# Altium PCB PCB.PcbDoc
Units mm, origin at the board's own origin, x right, y up, seen from the top; angles counter-clockwise.
Board outline 64 x 88.4 mm, 2 copper layers (Top Layer, Bottom Layer), stack 1.569 mm thick; 70 components, 61 nets, 263 pads, 93 vias.
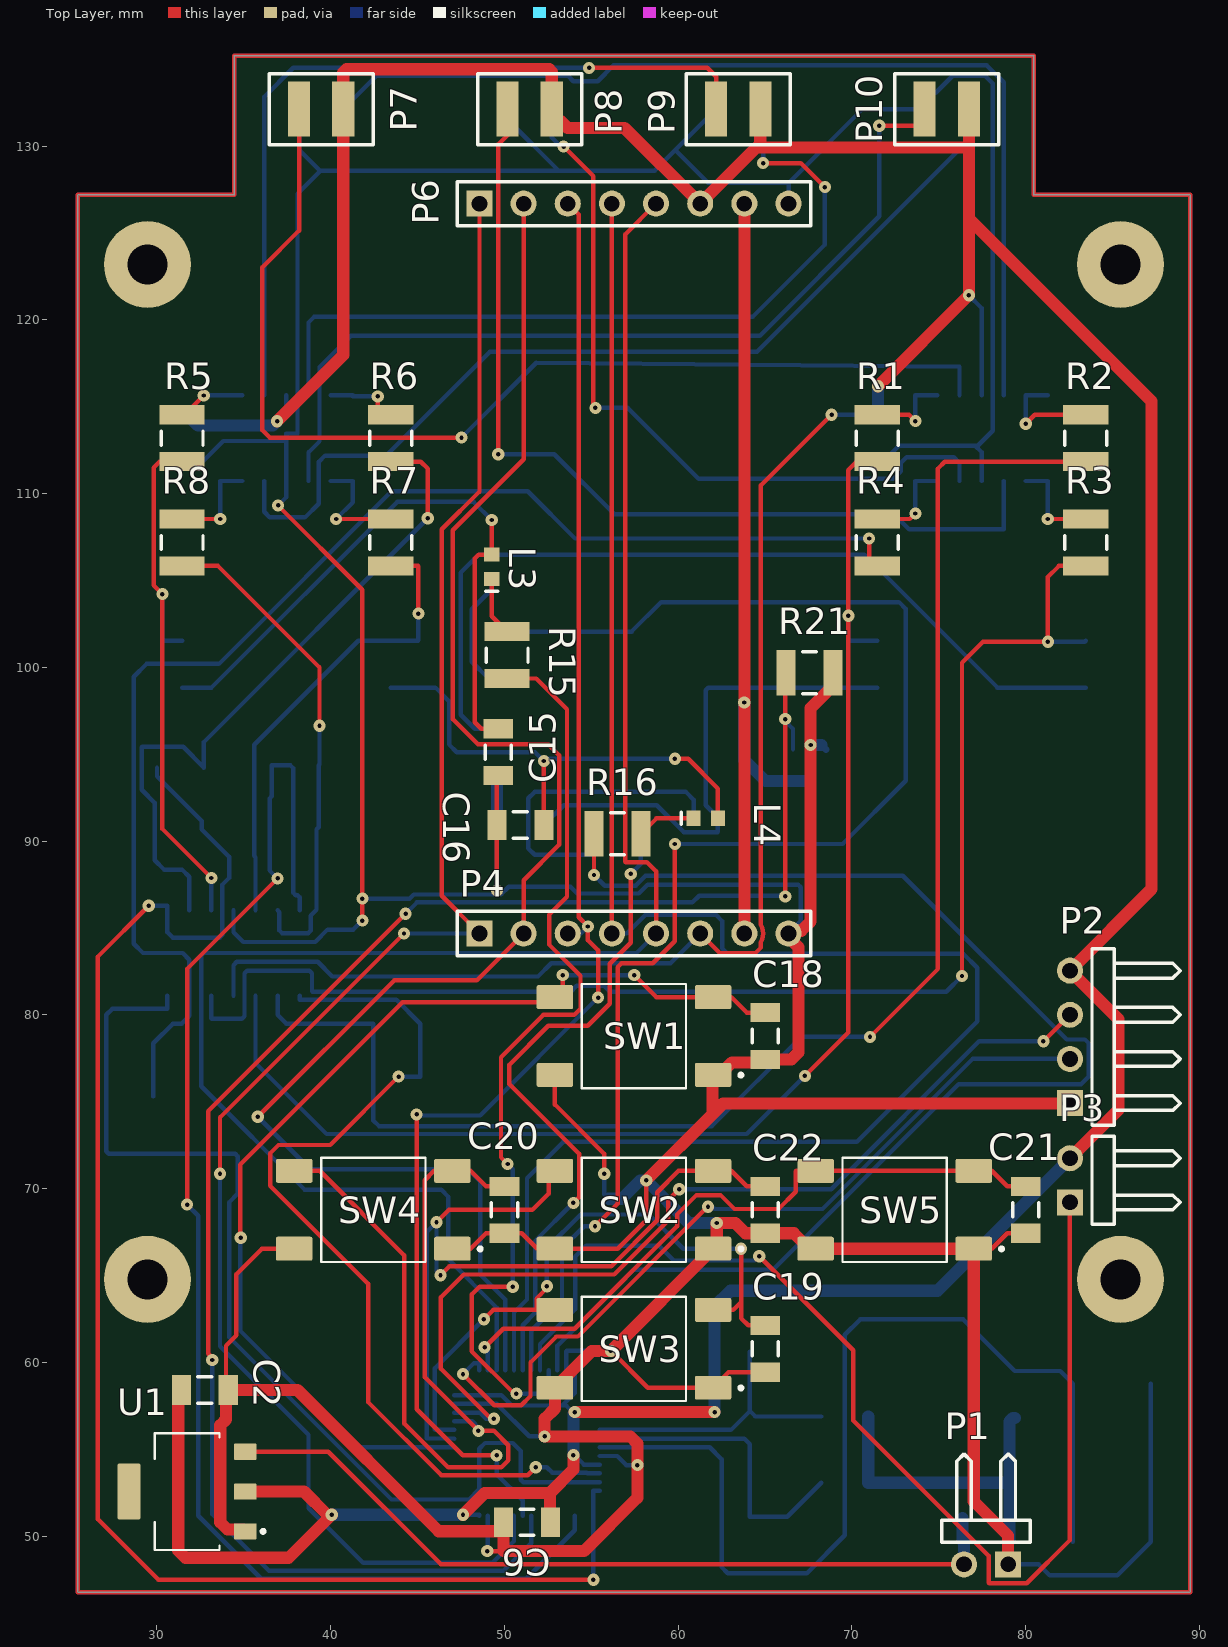
[diagram p0: Top Layer view]
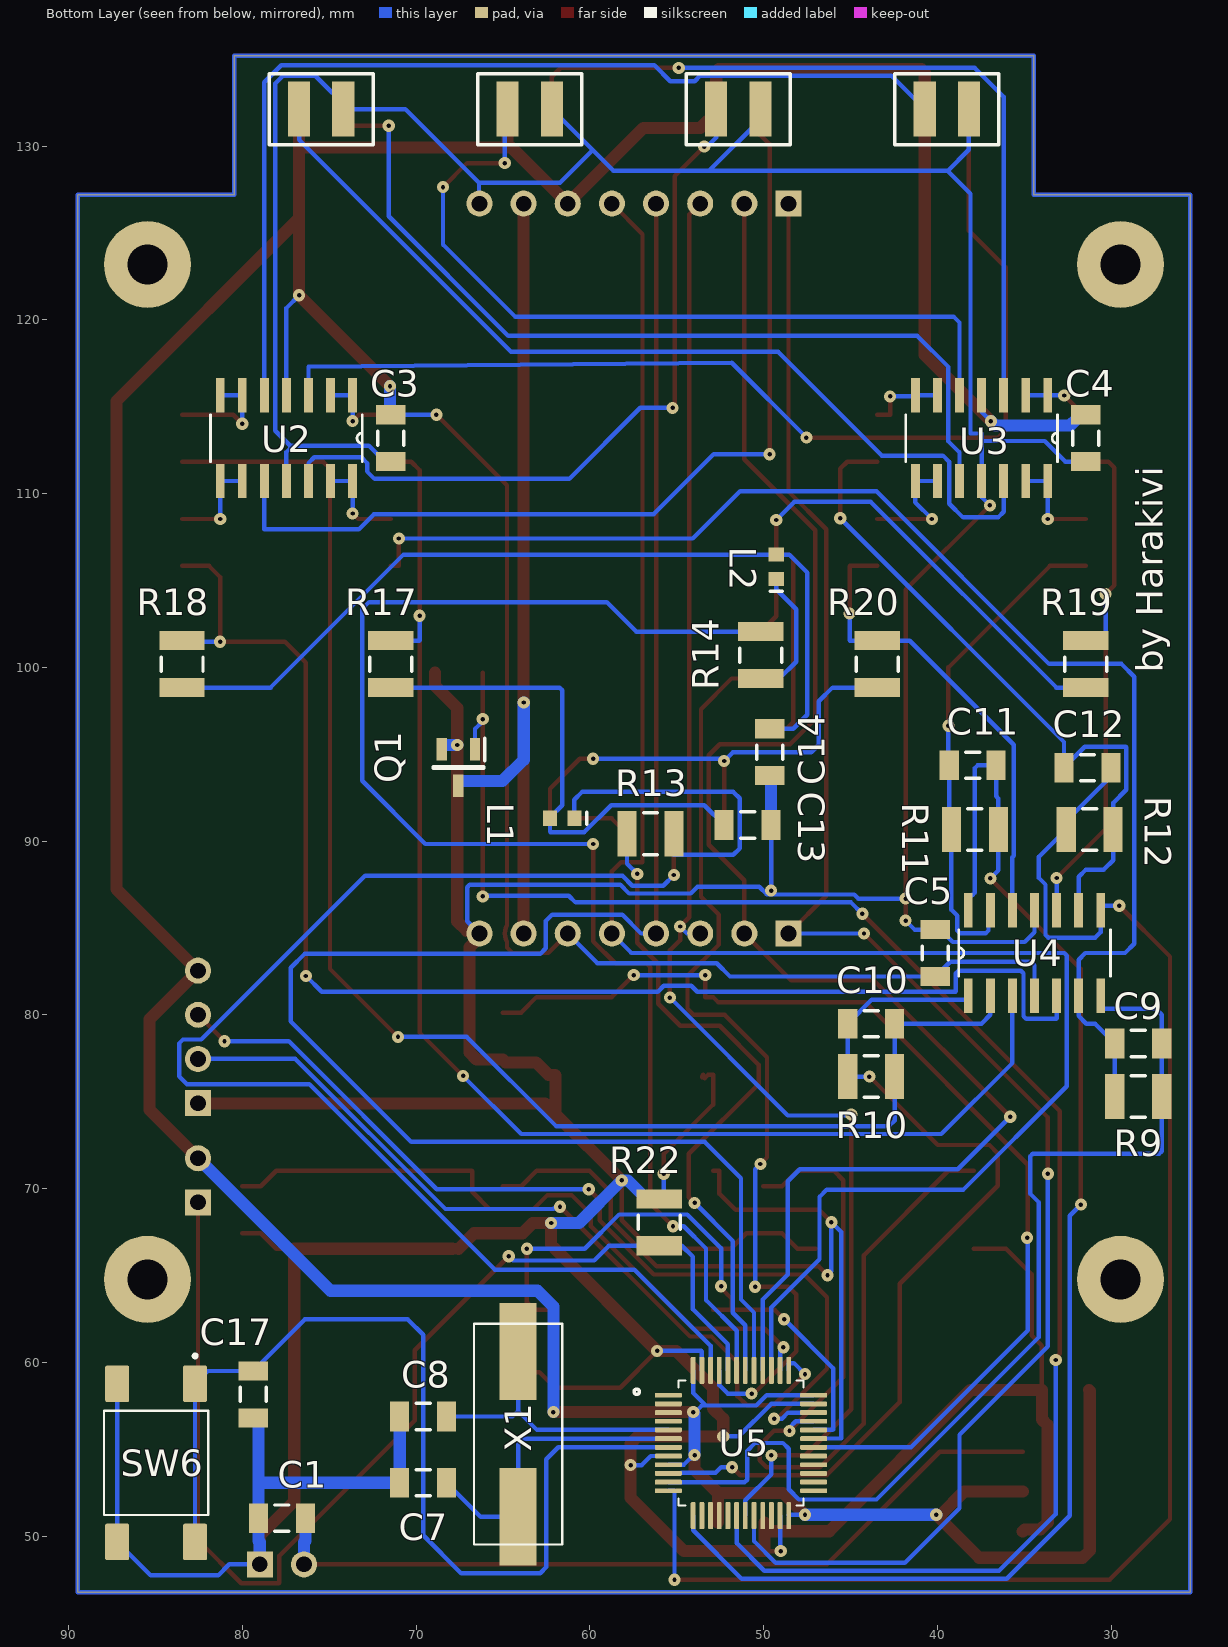
[diagram p1: Bottom Layer view, seen from below]

## Layer stack, top to bottom
Top Solder: solder mask 0.0254, SM-001, Dk 4
Top Layer: signal copper 0.035
Dielectric 1: core 1.4986, Core-043, Dk 4.3
Bottom Layer: signal copper 0.035
Bottom Solder: solder mask 0.0254, SM-001, Dk 4

## Board outline
25.464,46.79 25.464,127.19 34.464,127.19 34.464,135.19 80.464,135.19 80.464,127.19 89.464,127.19 89.464,46.79

## Design rules (kind name [scope] priority, off if disabled: settings)
Clearance [All] p1: gap=0.2 ignorepadtopadclearanceinfootprint=TRUE
DiffPairsRouting [All] p1: maxlimit=1 minlimit=0.1 mostfreqgap=0.254 toplayer_minwidth=0.1 toplayer_maxwidth=1 toplayer_prefwidth=0.381 bottomlayer_minwidth=0.1 bottomlayer_maxwidth=1 bottomlayer_prefwidth=0.381 maxuncoupledlength=12.7
PolygonConnect [All] p1: connectstyle=Relief reliefconductorwidth=0.254 reliefentries=4 polygonreliefangle="90 Angle" airgapwidth=0.254
RoomDefinition control [InComponentClass('control')] p1: confinementstyle=ConfineIn formatcopy=TRUE lockcomponents=FALSE outline 25.4,46.736 89.535,46.736 89.535,135.19 25.4,135.19
RoutingVias [All] p1: holewidth=0.254 width=0.7 viastyle="Through Hole" minholewidth=0.1 minwidth=0.1 maxholewidth=0.711 maxwidth=1.27
SilkToSilkClearance [All] p1: silktosilkclearance=0.1
SolderMaskExpansion [All] p1: expansion=0.102 istentingtop=FALSE
Width Width_V3.3 [InNet('V3.3')] p1: maxlimit=1 minlimit=0.1 preferedwidth=0.7 bottomlayer_prefwidth=0.254 minimp=50.000000 maximp=50.000000 favimp=50.000000
Width Width_GND [InNet('GND')] p2: maxlimit=1 minlimit=0.1 preferedwidth=0.7 bottomlayer_prefwidth=0.254 minimp=50.000000 maximp=50.000000 favimp=50.000000
Width [All] p3: maxlimit=1 minlimit=0.1 preferedwidth=0.254
28 further rules are at their usual default settings.

## Components (designator, comment, footprint, x,y, rotation, side; value= is the part's Value field where it differs from the comment)
C1 "Cap Semi" C1206 77.724,51.054 r180 bottom value=10uF
C2 "Cap Semi" C1206 32.766,58.42 r180 top value=1uF
C3 "Cap Semi" C1206 71.464,113.19 r90 bottom locked value=10uF
C4 "Cap Semi" C1206 31.464,113.19 r90 bottom locked value=10uF
C5 "Cap Semi" C1206 40.132,83.566 r270 bottom value=10uF
C6 "Cap Semi" C1206 51.308,50.8 r0 top value=10uF
C7 "Cap Semi" C1206 69.596,53.086 r180 bottom value=12pF
C8 "Cap Semi" C1206 69.596,56.896 r180 bottom value=12pF
C9 "Cap Semi" C1206 28.448,78.359 r0 bottom value=100pF
C10 "Cap Semi" C1206 43.815,79.502 r180 bottom value=100pF
C11 "Cap Semi" C1206 37.973,94.361 r0 bottom value=100pF
C12 "Cap Semi" C1206 31.369,94.234 r0 bottom value=100pF
C13 "Cap Semi" C1206 50.927,90.932 r0 bottom value=10uF
C14 "Cap Semi" C1206 49.657,95.123 r90 bottom value=10uF
C15 "Cap Semi" C1206 49.657,95.123 r90 top value=10uF
C16 "Cap Semi" C1206 50.927,90.932 r0 top value=10uF
C17 "Cap Semi" C1206 79.375,58.166 r90 bottom value=100nF
C18 "Cap Semi" C1206 65.014,78.79 r90 top locked value=100nF
C19 "Cap Semi" C1206 65.014,60.79 r90 top locked value=100nF
C20 "Cap Semi" C1206 50.014,68.79 r90 top locked value=100nF
C21 "Cap Semi" C1206 80.014,68.79 r90 top locked value=100nF
C22 "Cap Semi" C1206 65.014,68.79 r90 top locked value=100nF
L1 "Inductor" INDC1608L 61.595,91.313 r0 bottom value=10uH
L2 "Inductor" INDC1608L 49.276,105.791 r90 bottom value=10uH
L3 "Inductor" INDC1608L 49.276,105.791 r90 top value=10uH
L4 "Inductor" INDC1608L 61.595,91.313 r0 top value=10uH
P1 "BatteryCon" HDR1X2H 78.994,48.387 r180 top locked
P2 "Debug" HDR1X4H 82.55,74.93 r90 top
P3 "Header 2H" HDR1X2H 82.55,69.215 r90 top
P4 "DisplayPort" HDR1X8 48.574,84.69 r0 top locked
P6 "DisplayPort" HDR1X8 48.574,126.69 r0 top locked
P7 "Conn" CONNFOOT 40.733,132.128 r0 top locked
P8 "Conn" CONNFOOT 52.733,132.128 r0 top locked
P9 "Conn" CONNFOOT 64.733,132.128 r0 top locked
P10 "Conn" CONNFOOT 76.733,132.128 r0 top locked
Q1 "IRLML0030TRPBF" SOT95P237X112-3N 67.564,94.234 r270 bottom
R1 "Res3" 14-1210 71.464,113.19 r90 top locked value=1K
R2 "Res3" 14-1210 83.464,113.19 r90 top locked value=1K
R3 "Res3" 14-1210 83.464,107.19 r90 top locked value=1K
R4 "Res3" 14-1210 71.464,107.19 r90 top locked value=1K
R5 "Res3" 14-1210 31.464,113.19 r90 top locked value=1K
R6 "Res3" 14-1210 43.464,113.19 r90 top locked value=1K
R7 "Res3" 14-1210 43.464,107.19 r90 top locked value=1K
R8 "Res3" 14-1210 31.464,107.19 r90 top locked value=1K
R9 "Res3" 14-1210 28.448,75.311 r0 bottom value=1K
R10 "Res3" 14-1210 43.815,76.454 r180 bottom value=1K
R11 "Res3" 14-1210 37.846,90.678 r0 bottom value=1K
R12 "Res3" 14-1210 31.242,90.678 r180 bottom value=1K
R13 "Res3" 14-1210 56.515,90.424 r180 bottom value=10
R14 "Res3" 14-1210 50.165,100.711 r270 bottom value=10
R15 "Res3" 14-1210 50.165,100.711 r90 top value=10
R16 "Res3" 14-1210 56.515,90.424 r0 top value=10
R17 "Res3" 14-1210 71.464,100.19 r90 bottom locked value=1k
R18 "Res3" 14-1210 83.464,100.19 r90 bottom locked value=1k
R19 "Res3" 14-1210 31.464,100.19 r90 bottom locked value=1k
R20 "Res3" 14-1210 43.464,100.19 r270 bottom locked value=1k
R21 "Res3" 14-1210 67.564,99.695 r180 top value=10k
R22 "Res3" 14-1210 56.007,68.072 r270 bottom value=100k
SW1 "Up" TE_FSM4JSMA 57.464,78.79 r180 top locked
SW2 "Enter" TE_FSM4JSMA 57.464,68.79 r180 top locked
SW3 "Down" TE_FSM4JSMA 57.464,60.79 r180 top locked
SW4 "Left" TE_FSM4JSMA 42.464,68.79 r180 top locked
SW5 "Right" TE_FSM4JSMA 72.464,68.79 r180 top locked
SW6 "Reset" TE_FSM4JSMA 84.963,54.229 r270 bottom
U1 "AMS1117-3.3" SOT229P700X180-4N 31.75,52.578 r90 top
U2 "LM324AD" SOIC127P600X175-14N 77.464,113.19 r270 bottom locked
U3 "LM324AD" SOIC127P600X175-14N 37.464,113.19 r270 bottom locked
U4 "LM324AD" SOIC127P600X175-14N 34.417,83.566 r90 bottom
U5 "STM32F103C8T6" QFP50P900X900X160-48N 51.308,55.372 r180 bottom
X1 "ABLS-8.000MHZ-B4-T" HC-49/US 64.135,55.88 r270 bottom

## Footprints (in the part's own frame and the unit in brackets; to place one, negate y for a bottom-side part, rotate by r counter-clockwise, add the part's x,y. Pads: shape width x height; smd on the part's side, far side on the other; paste and mask are expansions set on the pad)
14-1210 [mm] "Chip Resistor, Body 3.2x2.5mm, IPC High Density"
  rect 1.1x2.6 smd: 1(-1.35,0) 2(1.35,0)
  silkscreen extent -0.4,-1.2 0.4,1.2, body extent -1.68,-1.32 1.68,1.32, height 0.9
C1206 [mm] "Chip Capacitor, Body 3.2x1.6mm, IPC High Density"
  rect 1.1x1.7 smd: 1(-1.35,0) 2(1.35,0)
  silkscreen extent -0.4,-0.75 0.4,0.75, body extent -1.7,-0.9 1.7,0.9, height 1.3
CONNFOOT [mm]
  rect 1.27x3.18 smd: 1(-2.54,0) 2(0,0)
  rect 1.27x3.18 smd far side: 3(-2.54,0) 4(0,0)
  silkscreen extent -4.26,-2.04 1.72,2.02
HC-49/US [mil]
  rect 220x83 smd: P$1(187,0) P$2(-187,0)
  silkscreen extent -250,-100 250,100
HDR1X2H [mm] "Connector; Header; 2 Position; Right Angle"
  rect 1.5x1.5 hole 0.9: 1(0,0)
  round 1.5 hole 0.9: 2(2.54,0)
  silkscreen extent -1.27,-6.35 3.81,-1.27
HDR1X4H [mm] "Connector; Header; 4 Position; Right Angle"
  rect 1.5x1.5 hole 0.9: 1(0,0)
  round 1.5 hole 0.9: 2(2.54,0) 3(5.08,0) 4(7.62,0)
  silkscreen extent -1.27,-6.35 8.89,-1.27
HDR1X8 [mm] "Connector; Header; 8 Position"
  rect 1.5x1.5 hole 0.9: 1(0,0)
  round 1.5 hole 0.9: 2(2.54,0) 3(5.08,0) 4(7.62,0) 5(10.16,0) 6(12.7,0) 7(15.24,0) 8(17.78,0)
  silkscreen extent -1.27,-1.27 19.05,1.27
INDC1608L [mm] "Chip Inductor, Body 1.6x0.8mm, IPC High Density"
  rect 0.8x0.9 smd: 1(-0.7,0) 2(0.7,0)
  silkscreen extent -1.4,-0.35 -1.4,0.35, body extent -0.87,-0.48 0.87,0.48, height 0.55
QFP50P900X900X160-48N [mm]
  rrect50% 1.56x0.28 smd: 1(-4.18,2.75) 2(-4.18,2.25) 3(-4.18,1.75) 4(-4.18,1.25) 5(-4.18,0.75) 6(-4.18,0.25) 7(-4.18,-0.25) 8(-4.18,-0.75) 9(-4.18,-1.25) 10(-4.18,-1.75) 11(-4.18,-2.25) 12(-4.18,-2.75) 25(4.18,-2.75) 26(4.18,-2.25) 27(4.18,-1.75) 28(4.18,-1.25) 29(4.18,-0.75) 30(4.18,-0.25) 31(4.18,0.25) 32(4.18,0.75) 33(4.18,1.25) 34(4.18,1.75) 35(4.18,2.25) 36(4.18,2.75)
  rrect50% 0.28x1.56 smd: 13(-2.75,-4.18) 14(-2.25,-4.18) 15(-1.75,-4.18) 16(-1.25,-4.18) 17(-0.75,-4.18) 18(-0.25,-4.18) 19(0.25,-4.18) 20(0.75,-4.18) 21(1.25,-4.18) 22(1.75,-4.18) 23(2.25,-4.18) 24(2.75,-4.18) 37(2.75,4.18) 38(2.25,4.18) 39(1.75,4.18) 40(1.25,4.18) 41(0.75,4.18) 42(0.25,4.18) 43(-0.25,4.18) 44(-0.75,4.18) 45(-1.25,4.18) 46(-1.75,4.18) 47(-2.25,4.18) 48(-2.75,4.18)
  silkscreen extent -6.15,-3.6 3.6,3.6
SOIC127P600X175-14N [mil]
  rect 78x20 smd: 1(-97,150) 2(-97,100) 3(-97,50) 4(-97,0) 5(-97,-50) 6(-97,-100) 7(-97,-150) 8(97,-150) 9(97,-100) 10(97,-50) 11(97,0) 12(97,50) 13(97,100) 14(97,150)
  silkscreen extent -53,-172 53,172
SOT95P237X112-3N [mm]
  rect 1.3x0.6 smd: 1(-1.05,0.95) 2(-1.05,-0.95) 3(1.05,0)
  silkscreen extent -1.7,-1.46 0.05,1.5
SOT229P700X180-4N [mm]
  rrect15% 0.93x1.31 smd: 1(-2.29,-3.345) 2(0,-3.345) 3(2.29,-3.345)
  rrect15% 3.24x1.31 smd: 4(0,3.345)
  silkscreen extent -3.36,-4.47 3.36,1.86
TE_FSM4JSMA [mm]
  rrect15% 2.1x1.38 smd: 1(-4.55,2.24) 2(4.55,2.24) 3(-4.55,-2.24) 4(4.55,-2.24)
  silkscreen extent -6.25,-3 3,3

## Part data
C1 C2 C3 C4 C5 C6 C7 C8 C9 C10 C11 C12 C13 C14 C15 C16 C17 C18 C19 C20 C21 C22: "Capacitor (Semiconductor SIM Model)", LatestRevisionDate=29-May-2009, LatestRevisionNote="IPC-7351 Footprint Added.", PackageDescription="Chip Capacitor", PackageReference=C1206, Published=8-Jun-2000, Publisher="Altium Limited"
P1: library part "Header 2H", "Header, 2-Pin, Right Angle", LatestRevisionDate=17-Jul-2002, LatestRevisionNote="Re-released for DXP Platform.", Publisher="Altium Limited"
P2: library part "Header 4H", "Header, 4-Pin, Right Angle", LatestRevisionDate=17-Jul-2002, LatestRevisionNote="Re-released for DXP Platform.", Publisher="Altium Limited"
P3: "Header, 2-Pin, Right Angle", LatestRevisionDate=17-Jul-2002, LatestRevisionNote="Re-released for DXP Platform.", Publisher="Altium Limited"
P4 P6: library part "Header 8", "Header, 8-Pin", LatestRevisionDate=17-Jul-2002, LatestRevisionNote="Re-released for DXP Platform.", Publisher="Altium Limited"
P7 P8 P9 P10: library part ConnectorSMD
Q1: "N-Channel 30V 5.3A _Ta_ 1.3W _Ta_ Surface Mount Micro3â„¢/SOT-23", Package="SOT-23 International Rectifier", Availability=Unavailable, MF="Infineon Technologies", MP=IRLML0030TRPBF, Price=None, SnapEDA_Link=https://www.snapeda.com/parts/IRLML0030TRPBF/Infineon%20Technologies/view-part/246217/?ref=snap
R1 R2 R3 R4 R5 R6 R7 R8 R9 R10 R11 R12 R13 R14 R15 R16 R17 R18 R19 R20 R21 R22: "Resistor", LatestRevisionDate=29-May-2009, LatestRevisionNote="IPC-7351 Footprint Added.", PackageDescription="Chip Resistor", PackageReference=J1-0603, Published=8-Jun-2000, Publisher="Altium Limited"
SW1 SW2 SW3 SW4 SW5 SW6: library part FSM4JSMA, "Tactile Switch SPST-NO Top Actuated Surface Mount", Contact_Current_Rating="50 mA", Package=None, Availability=Unavailable, Configuration_Pole-Throw="Single Pole - Single Throw", EU_RoHS_Compliance=Compliant, MF="TE Connectivity", MP=FSM4JSMA, Price=None, SnapEDA_Link=https://www.snapeda.com/parts/FSM4JSMA/TE%20Connectivity%20ALCOSWITCH%20Switches/view-part/543632/?ref=snap, TE_purchase_URL=https://www.te.com/usa-en/product-4-1437565-1.html?te_bu=Cor&te_type=disp&te_campaign=seda_glo_cor-seda-global-disp-prtnr-fy19-seda-model-bom-cta_sma-317_1&elqCampaignId=32493
U1: "Sot223/Pkg 1-Amp 3.3-Volt Low Drop Out Voltage Regulatator", Package=None, Availability=Unavailable, MF="Advanced Monolithic Systems", MP=AMS1117-3.3, Price=None, SnapEDA_Link=https://www.snapeda.com/parts/AMS1117-3.3/Advanced%20Monolithic%20Systems/view-part/53450/?ref=snap
U2 U3 U4: "Op Amp Quad Low Power Amplifier Â±15V/30V 14-Pin SOIC Tube", Package=None, Availability=Unavailable, MF="Texas Instruments", MP=LM324AD, Price=None, SnapEDA_Link=https://www.snapeda.com/parts/LM324AD/Texas%20Instruments/view-part/4804679/?ref=snap
U5: "ARMÂ® CortexÂ®-M3 STM32F1 Microcontroller IC 32-Bit 72MHz 64KB _64K x 8_ FLASH", Package="LQFP-48 STMicroelectronics", Availability=Unavailable, MF=STMicroelectronics, MP=STM32F103C8T6, Price=None, SnapEDA_Link=https://www.snapeda.com/parts/STM32F103C8T6/STMicroelectronics/view-part/52195/?ref=snap
X1: "8MHz Â±30ppm Crystal 18pF 80 Ohms HC-49/US", Package="HC-49/US Abracon LLC", Availability=Unavailable, MF="Abracon LLC", MP=ABLS-8.000MHZ-B4-T, Price=None, SnapEDA_Link=https://www.snapeda.com/parts/ABLS-8.000MHZ-B4-T/Abracon%20LLC/view-part/306310/?ref=snap
L1 L2 L3 L4: Code_IEC=1005, Code_JEITA=0402, LatestRevisionDate=29-May-2009, LatestRevisionNote="IPC-7351 Footprint Added.", PackageDescription="Chip Inductor", PackageReference=0402-A, Published=8-Jun-2000, Publisher="Altium Limited"

## Free pads (board coordinates)
  round 5 hole 2.3: 1(29.464,64.79) 1(29.464,123.19) 1(85.464,64.79) 1(85.464,123.19)

## Via types
v1: diameter 0.7, hole 0.254, Top Layer to Bottom Layer, 93 vias

## Nets (pads, with @x,y where several pads share a name; then routed paths per layer and width w, separated by ;. In a path a pad name is that pad's centre, name@x,y a point inside that pad or via, vN(x,y) a via of type N, cw(c..) or ccw(c..) an arc to the next point about the centre after c; other vN are vias at no path point)
CE: P4.2 P6.2 U5.40 | length 94.9
  Top Layer w0.254: v1(35.814,74.143) 43.663,81.991 48.415,81.991 P4.2 51.114,87.749 53.154,89.789 53.154,94.953 52.527,95.58 48.489,95.58 47.041,97.028 47.041,107.899 51.114,111.972 P6.2
  Bottom Layer w0.254: v1(35.814,74.143) 38.837,71.12 47.93,71.12 48.616,70.434 48.616,65.069 50.058,63.627 U5.40
CLK: P4.5 P6.5 U5.39 | length 106.4
  Top Layer w0.254: P4.5 58.734,88.265 58.202,88.797 56.998,88.797 56.972,88.822 56.972,124.928 P6.5
  Bottom Layer w0.254: U5.39 49.558,63.17 46.787,65.941 46.787,69.532 46.368,69.952 38.506,69.952 32.563,75.895 32.563,83.417 32.712,83.566 57.61,83.566 P4.5
DC: P4.3 P6.3 U5.19 | length 87.8
  Top Layer w0.254: v1(44.958,74.283) 44.958,57.307 47.604,54.661 v1(49.555,54.661) ; P6.3 54.28,126.064 54.28,85.623 v1(54.813,85.09) 54.813,84.303 55.397,83.718 v1(55.397,81.001)
  Bottom Layer w0.254: v1(44.958,74.283) 45.022,74.219 48.616,74.219 v1(55.397,81.001) ; v1(49.555,54.661) 49.555,53.574 51.058,52.071 U5.19 ; P4.3 54.413,84.69 v1(54.813,85.09)
DIN: P4.4 P6.4 U5.41 | length 109.8
  Top Layer w0.254: P4.4 P6.4
  Bottom Layer w0.254: U5.41 50.558,62.877 51.308,63.627 51.308,70.612 53.394,72.698 70.285,72.698 77.216,79.629 77.216,82.719 76.42,83.515 62.865,83.515 62.535,83.845 62.535,85.407 62.166,85.776 58.141,85.776 57.055,84.69 P4.4
dispRES: P4.1 P6.1 U5.20 | length 102.8
  Top Layer w0.254: v1(33.643,70.861) 33.643,74.105 v1(44.228,84.69) ; P4.1 46.406,86.858 46.406,107.95 48.574,110.118 P6.1
  Bottom Layer w0.254: v1(33.643,70.861) 33.643,60.933 38.735,55.841 38.735,51.621 41.884,48.472 49.302,48.472 50.558,49.728 U5.20 ; v1(44.228,84.69) P4.1
GND: C1.1 C2.1 C3.1 C4.1 C5.1 C6.1 C7.1 C8.1 C13.1 C14.1 C15.1 C16.1 C17.1 C18.1 C19.1 C20.1 C21.1 C22.1 P1.1 P2.1 P4.8 P6.8 P7.3 P8.3 P9.3 P10.3 Q1.2 R21.1 R22.1 SW1.1 SW1.2 SW2.1 SW2.2 SW3.1 SW3.2 SW4.1 SW4.2 SW5.1 SW5.2 SW6.3 SW6.4 U1.1 U2.11 U3.11 U4.11 U5.8 U5.23 U5.35 U5.47 | length 458.8
  Top Layer w0.254: C2.1@33.989,58.42 33.989,60.969 34.586,61.566 34.586,65.081 36.055,66.55 SW4.2 ; v1(36.982,109.322) 41.834,104.47 v1(41.834,86.694) v1(41.834,85.433) ; SW4.1 48.057,66.55 48.947,67.44 C20.1 51.003,67.44 51.893,66.55 SW2.2 56.525,66.55 58.166,68.191 v1(58.166,70.485) ; v1(49.022,49.149) 49.958,49.149 ; v1(49.577,87.155) C16.1 49.577,93.773 C15.1 ; 52.914,57.337 52.914,57.359 ; SW1.2@53.479,76.56 53.549,76.421 53.385,76.371 53.206,76.55 SW1.2 52.914,74.846 55.753,72.007 v1(55.753,70.866) ; v1(56.136,60.672) 58.258,58.55 SW3.1 62.904,59.44 C19.1 ; SW2.1 SW2.1@62.23,66.766 ; SW5.2@67.554,66.55 SW5.2 ; SW5.1 78.054,66.55 78.944,67.44 C21.1
  Top Layer w0.7: U1.1 34.98,50.403 34.065,50.403 33.655,50.813 33.655,56.388 33.989,56.722 33.989,58.42 C2.1 38.1,58.42 46.228,50.292 C6.1@49.958,50.292 ; C6.1 C6.1@49.958,50.292 ; v1(58.166,70.485) 61.976,74.295 ; SW2.1 v1(56.136,60.672) 55.036,60.672 SW3.2 52.914,57.359 52.324,56.769 v1(52.324,55.753) 57.248,55.753 57.658,55.343 v1(57.658,54.102) 57.658,52.217 54.59,49.149 49.958,49.149 C6.1@49.958,50.292 ; SW2.1@62.23,66.766 v1(62.23,68.03) 63.288,68.03 63.878,67.44 C22.1 66.664,67.44 SW5.2@67.554,66.55 ; C18.1@64.849,77.276 63.099,77.276 62.374,76.55 SW1.1 61.976,76.512 61.976,74.295 ; C18.1 66.519,77.44 66.929,77.85 66.929,83.899 66.354,84.474 P4.8 66.507,84.843 67.093,84.843 67.63,85.38 v1(67.63,95.538) 67.63,97.661 68.914,98.945 R21.1 ; SW5.2 SW5.1 77.014,52.018 78.994,50.038 P1.1 ; P2.1 82.52,74.9 62.581,74.9 61.976,74.295
  Bottom Layer w0.254: C4.1 32.637,111.84 33.827,113.03 37.464,113.03 ; U4.11 34.417,84.766 34.982,84.201 39.117,84.201 39.832,84.916 C5.1 41.317,84.916 v1(41.834,85.433) ; v1(36.982,109.322) 37.464,109.803 U3.11 37.464,113.03 ; P7.3 38.193,129.783 39.411,128.565 ; v1(41.834,86.694) 44.548,86.694 44.786,86.931 v1@49.577,86.931 ; U5.35 49.566,57.622 51.435,55.753 v1(52.324,55.753) ; v1(49.022,49.149) 49.058,49.185 U5.23 ; C13.1 v1(49.577,87.155) v1@49.577,86.931 ; C14.1@49.577,93.693 C14.1 ; P8.3 50.193,131.521 53.127,128.588 ; U5.47 53.558,60.636 53.594,60.672 v1(56.136,60.672) ; U5.8 56.503,54.622 57.023,54.102 v1(57.658,54.102) ; v1(55.753,70.866) 55.753,69.676 R22.1 ; P9.3 59.838,129.773 ; P4.8 67.056,85.392 67.056,87.354 66.907,87.503 58.259,87.503 57.745,86.989 54.196,86.989 53.809,87.376 50.259,87.376 49.814,86.931 v1@49.577,86.931 ; P6.8 66.38,126.716 66.38,127.889 ; C3.1 71.806,111.84 72.716,112.751 77.108,112.751 ; U2.11 77.464,112.395 77.108,112.751 ; P1.1 80.747,48.387 81.382,47.752 85.276,47.752 SW6.4 SW6.3 ; 37.464,113.03 37.464,113.462 38.1,113.462 38.1,127.254 39.411,128.565 ; 39.411,128.565 39.433,128.588 53.127,128.588 ; 53.127,128.588 58.653,128.588 59.838,129.773 ; 59.838,129.773 61.722,127.889 66.38,127.889 ; 66.38,127.889 70.619,132.128 P10.3 74.193,133.071 74.831,133.071 75.806,134.045 77.66,134.045 78.105,133.6 78.105,113.614 77.241,112.751 77.108,112.751
  Bottom Layer w0.4: Q1.2@68.26,95.538 Q1.2
  Bottom Layer w0.7: C13.1 C14.1@49.577,93.693 ; R22.1 56.757,69.422 57.82,70.485 v1(58.166,70.485) 60.621,68.03 v1(62.23,68.03) ; v1(67.63,95.538) Q1.2@68.26,95.538 ; C7.1 C8.1 ; C7.1@70.993,53.086 79.052,53.086 79.074,53.108 ; P1.1 78.994,49.657 79.074,49.737 C1.1 79.074,53.108 ; C17.1 79.274,56.816 79.074,56.616 79.074,53.108
Light: P4.7 P6.7 Q1.3 | length 49.7
  Top Layer w0.7: P4.7 P6.7
  Bottom Layer w0.4: Q1.3@67.276,93.472 Q1.3
  Bottom Layer w0.7: v1(63.81,97.98) 63.81,94.686 65.024,93.472 Q1.3@67.276,93.472
NetC7_2: C7.2 U5.6 X1.P$1 | length 17.9
  Bottom Layer w0.254: U5.6 63.817,55.622 64.135,55.304 X1.P$1 66.29,51.13 C7.2
NetC8_2: C8.2 U5.5 X1.P$2 | length 16.8
  Bottom Layer w0.254: U5.5 63.044,56.122 64.135,57.213 ; X1.P$2 64.135,57.213 ; C8.2 64.453,56.896 64.135,57.213
NetC9_1: C9.1 R9.1 U4.7 U5.11 | length 60.4
  Bottom Layer w0.254: U4.7 30.607,80.366 27.454,80.366 27.098,80.01 C9.1 R9.1 27.098,72.158 27.247,72.009 34.522,72.009 34.671,71.86 34.671,69.723 34.163,69.215 34.163,61.468 43.51,52.121 47.981,52.121 48.565,52.705 48.565,55.042 48.895,55.372 50.494,55.372 50.954,54.913 50.954,53.258 51.103,53.109 55.475,53.109 U5.11
NetC9_2: C9.2 R4.1 R9.2 U4.6 | length 77.9
  Top Layer w0.254: v1(70.993,107.417) 70.993,105.84 R4.1
  Bottom Layer w0.254: R9.2 C9.2 29.798,78.367 30.933,79.502 31.432,79.502 31.877,79.947 U4.6 31.877,83.185 31.496,83.566 29.21,83.566 28.677,84.099 28.677,99.466 29.413,100.203 33.579,100.203 43.51,110.134 51.359,110.134 54.077,107.417 v1(70.993,107.417)
NetC10_1: C10.1 R10.1 U4.1 U5.10 | length 53.3
  Top Layer w0.254: v1(43.917,76.454) 39.98,72.517 37.008,72.517 36.525,72.034 36.525,70.168 42.164,64.529 42.164,57.727 46.383,53.508 51.349,53.508 v1(51.816,53.975)
  Bottom Layer w0.254: U4.1 38.227,80.885 43.782,80.885 C10.1 R10.1 v1(43.917,76.454) ; v1(51.816,53.975) 52.451,53.975 52.771,53.655 54.756,53.655 54.776,53.635 55.475,53.635 U5.10
NetC10_2: C10.2 R2.1 R10.2 U4.2 | length 86.2
  Top Layer w0.254: v1(71.044,78.74) 74.955,82.652 74.955,111.442 75.353,111.84 R2.1
  Bottom Layer w0.254: U4.2 36.957,80.01 37.465,79.502 C10.2 R10.2 42.465,73.931 42.79,73.606 61.947,73.606 67.081,78.74 v1(71.044,78.74)
NetC11_1: C11.1 R11.1 U4.14 U5.13 | length 80.7
  Top Layer w0.254: v1(31.75,69.088) 31.75,82.652 v1(36.957,87.859)
  Bottom Layer w0.254: v1(31.75,69.088) 32.385,68.453 32.385,51.188 36.009,47.564 51.271,47.564 54.058,50.351 U5.13 ; v1(36.957,87.859) 36.496,88.32 R11.1 36.496,92.456 36.623,92.583 C11.1 37.697,94.361 37.846,94.212 37.846,87.042 37.995,86.893 38.1,86.893 38.227,86.766 U4.14
NetC11_2: C11.2 R8.1 R11.2 U4.13 | length 28.8
  Top Layer w0.254: R8.1 33.528,105.84 39.37,99.998 v1(39.37,96.647)
  Bottom Layer w0.254: U4.13 37.064,85.923 37.064,84.861 37.212,84.712 38.713,84.712 38.862,84.861 38.862,85.721 39.196,86.055 R11.2 39.323,90.805 C11.2 39.37,94.408 v1(39.37,96.647)
NetC12_1: C12.1 R12.1 U4.8 U5.12 | length 89.4
  Top Layer w0.254: v1(29.54,86.284) 26.619,83.363 26.619,50.978 30.099,47.498 v1(55.131,47.498)
  Bottom Layer w0.254: v1(29.54,86.284) 30.607,86.284 U4.8 30.607,84.772 30.924,84.455 33.633,84.455 33.782,84.604 33.782,87.503 34.163,87.884 34.163,89.107 R12.1 32.592,91.161 30.019,93.734 C12.1 ; v1(55.131,47.498) 55.131,52.622 U5.12
NetC12_2: C12.2 R6.1 R12.2 U4.9 | length 40
  Top Layer w0.254: R6.1 45.195,111.84 45.593,111.442 v1(45.593,108.581)
  Bottom Layer w0.254: U4.9 31.877,87.947 31.458,88.367 30.425,88.367 29.892,88.9 R12.2 29.892,92.202 29.134,92.96 29.134,95.402 29.159,95.428 31.525,95.428 C12.2 32.719,95.707 v1(45.593,108.581)
NetC17_2: C17.2 SW6.1 SW6.2 U5.7 | length 57.3
  Bottom Layer w0.254: U5.7 61.827,55.122 62.506,54.443 62.506,48.238 62.865,47.879 67.415,47.879 69.596,50.06 69.596,61.595 70.485,62.484 76.407,62.484 C17.2 81.986,59.516 SW6.1 SW6.2
NetC18_2: C18.2 SW1.3 SW1.4 U5.30 | length 61.1
  Top Layer w0.254: v1(34.84,67.183) 34.798,67.225 34.798,71.385 44.134,80.721 52.605,80.721 SW1.4 53.361,81.03 v1(53.361,82.296) ; v1(57.48,82.296) 58.746,81.03 SW1.3 63.068,81.03 63.958,80.14 C18.2
  Bottom Layer w0.254: v1(34.84,67.183) 34.798,67.141 34.798,61.849 41.525,55.122 U5.30 ; v1(53.361,82.296) v1(57.48,82.296)
NetC19_2: C19.2 SW3.3 SW3.4 U5.32 | length 36.9
  Top Layer w0.254: v1(48.824,62.49) 49.365,63.03 51.854,63.03 ; v1@52.521,64.347 52.059,63.885 51.854,63.68 51.854,63.03 ; SW3.4 51.854,63.03 ; SW3.3 63.182,63.03 63.627,63.475 ; v1(63.627,66.548) 63.627,63.475 ; C19.2 64.034,62.14 63.627,62.547 63.627,63.475
  Bottom Layer w0.254: U5.32 46.025,56.122 45.999,56.147 45.999,59.665 v1(48.824,62.49) ; v1(52.451,64.389) 52.451,66.578 54.393,68.52 58.322,68.52 60.295,66.548 v1(63.627,66.548)
NetC20_2: C20.2 SW4.3 SW4.4 U5.33 | length 50.8
  Top Layer w0.254: SW4.4 39.384,71.03 44.247,66.167 44.247,56.49 46.765,53.971 49.836,53.971 50.232,54.368 50.232,55.243 49.405,56.07 v1(48.514,56.07) 45.42,59.165 45.42,70.49 45.96,71.03 SW4.3 48.057,71.03 48.947,70.14 C20.2
  Bottom Layer w0.254: U5.33 48.153,56.622 48.514,56.261 v1(48.514,56.07)
NetC21_2: C21.2 SW5.3 SW5.4 U5.38 | length 38.9
  Top Layer w0.254: v1(48.87,60.884) 49.937,61.952 54.05,61.952 59.944,67.846 59.944,68.521 61.061,69.638 62.442,69.638 63.246,68.834 65.786,68.834 66.777,69.825 66.777,71.005 66.802,71.03 SW5.4 SW5.3 78.054,71.03 78.944,70.14 C21.2
  Bottom Layer w0.254: v1(48.87,60.884) 49.058,60.695 U5.38
NetC22_2: C22.2 SW2.3 SW2.4 U5.31 | length 48.7
  Top Layer w0.254: v1(46.101,68.072) 46.819,68.79 51.62,68.79 52.553,69.723 52.553,71.03 SW2.4 ; v1(46.33,65.024) 46.838,65.532 56.149,65.532 58.801,68.184 58.801,69.805 60.026,71.03 SW2.3 63.068,71.03 63.958,70.14 C22.2
  Bottom Layer w0.254: v1(46.33,65.024) 46.101,65.253 v1(46.101,68.072) 45.542,67.513 45.542,55.647 U5.31
NetL1_1: L1.1 R13.2 | length 18.9
  Bottom Layer w0.254: R13.2 55.165,89.218 51.752,89.218 51.384,89.587 51.384,92.469 51.752,92.837 60.451,92.837 60.895,92.392 L1.1
NetL2_1: L2.1 R14.2 | length 7.7
  Bottom Layer w0.254: L2.1 49.276,104.496 48.133,103.353 48.133,100.326 49.098,99.361 R14.2
NetL3_1: L3.1 R15.2 | length 3.4
  Top Layer w0.254: L3.1 49.276,102.95 R15.2
NetL4_1: L4.1 R16.2 | length 3.4
  Top Layer w0.254: R16.2 58.754,91.313 L4.1
NetP3_1: P3.1 R22.2 U5.44 | length 68.1
  Top Layer w0.254: v1(64.668,66.116) 70.079,60.706 70.079,56.667 77.873,48.873 77.873,47.32 77.898,47.295 80.061,47.295 82.55,49.784 P3.1
  Bottom Layer w0.254: U5.44 52.058,61.049 54.088,63.079 54.088,66.098 54.712,66.722 R22.2 58.906,66.722 59.757,65.871 64.423,65.871 v1(64.668,66.116)
NetP7_1: P7.1 U2.3 | length 63.1
  Top Layer w0.254: P7.1 38.193,125.137 36.083,123.027 36.083,113.654 36.512,113.224 v1(47.54,113.224)
  Bottom Layer w0.254: v1(47.54,113.224) 51.841,117.526 76.194,117.297 U2.3
NetP7_4: P7.4 U2.5 | length 57.7
  Bottom Layer w0.254: P7.4 42.65,134.045 53.661,134.045 53.975,133.731 55.372,133.731 56.287,134.646 77.755,134.646 78.734,133.667 U2.5
NetP8_1: P8.1 U2.10 | length 53.7
  Top Layer w0.254: v1(49.657,112.268) 49.657,130.096 50.193,130.632 P8.1
  Bottom Layer w0.254: v1(49.657,112.268) 52.883,112.268 56.337,108.814 72.428,108.814 73.292,107.95 78.74,107.95 78.74,110.72 U2.10
NetP8_4: P8.4 U2.12 | length 42.9
  Top Layer w0.254: v1(53.416,129.972) 55.117,128.271 55.117,115.063 v1(55.245,114.935)
  Bottom Layer w0.254: P8.4 52.733,130.493 53.254,129.972 v1(53.416,129.972) ; v1(55.245,114.935) 57.097,114.935 61.187,110.846 72.39,110.846 72.822,111.277 72.822,111.76 73.152,112.09 75.864,112.09 76.194,111.76 U2.12
NetP9_1: P9.1 U3.3 | length 45.9
  Top Layer w0.254: v1(54.883,134.499) 61.679,134.499 62.193,133.985 P9.1
  Bottom Layer w0.254: U3.3 36.194,132.828 37.865,134.499 v1(54.883,134.499)
NetP9_4: P9.4 U3.5 | length 46.4
  Top Layer w0.254: v1(64.897,129.021) 67.067,129.021 v1(68.453,127.635)
  Bottom Layer w0.254: U3.5 38.734,119.849 39.052,120.167 64.287,120.167 68.453,124.333 v1(68.453,127.635) ; P9.4 64.897,131.964 v1(64.897,129.021)
NetP10_1: P10.1 U3.10 | length 51.4
  Top Layer w0.254: v1(71.577,131.166) 74.193,131.166 P10.1
  Bottom Layer w0.254: U3.10 38.734,112.37 39.37,113.006 39.37,117.284 41.161,119.075 64.694,119.075 71.577,125.959 v1(71.577,131.166)
NetP10_4: P10.4 U3.12 | length 54.6
  Bottom Layer w0.254: U3.12 36.194,108.951 36.512,108.632 38.528,108.632 39.319,109.423 39.319,111.823 39.688,112.192 43.205,112.192 49.174,118.161 64.541,118.161 76.733,130.353 P10.4
NetQ1_1: Q1.1 R21.2 U5.18 | length 98.4
  Top Layer w0.254: v1(33.198,60.147) 33.198,60.268 32.966,60.5 32.966,74.47 v1(44.323,85.827) ; v1(66.167,86.826) v1(66.167,97.028) R21.2@66.167,99.695
  Bottom Layer w0.254: v1(33.198,60.147) 33.198,51.283 36.462,48.018 49.962,48.018 51.558,49.614 U5.18 ; v1(44.323,85.827) 44.974,86.478 60.824,86.478 61.214,86.868 66.125,86.868 v1(66.167,86.826) ; v1(66.167,97.028) 66.167,96.907 66.614,96.46 Q1.1
NetR1_1: R1.1 R17.2 U4.3 | length 79.4
  Top Layer w0.254: v1(67.297,76.492) 69.799,78.994 v1(69.799,102.972) 69.799,111.357 70.282,111.84 R1.1
  Bottom Layer w0.254: U4.3 35.687,77.241 39.776,73.152 63.957,73.152 v1(67.297,76.492) ; v1(69.799,102.972) 69.799,101.565 69.825,101.54 R17.2
NetR1_2: R1.2 U2.1 U2.2 | length 5.1
  Top Layer w0.254: R1.2 73.287,114.54 v1(73.654,114.173)
  Bottom Layer w0.254: v1(73.654,114.173) U2.1 U2.2
NetR2_2: R2.2 U2.6 U2.7 | length 6.6
  Top Layer w0.254: v1(80.004,114.021) 80.523,114.54 R2.2
  Bottom Layer w0.254: v1(80.004,114.021) U2.6 U2.7
NetR3_1: R3.1 R18.2 U4.5 | length 80.7
  Top Layer w0.254: v1(76.34,82.245) 76.34,100.265 77.548,101.473 v1(81.28,101.473) 81.28,105.205 81.915,105.84 R3.1
  Bottom Layer w0.254: U4.5 33.147,79.807 33.172,79.781 34.903,79.781 35.052,79.93 35.052,82.401 35.201,82.55 38.789,82.55 38.938,82.401 38.938,81.364 38.964,81.339 53.82,81.339 54.161,81.68 55.744,81.68 56.085,81.339 75.433,81.339 v1(76.34,82.245) ; v1(81.28,101.473) 83.397,101.473 R18.2
NetR3_2: R3.2 U2.8 U2.9 | length 5.6
  Top Layer w0.254: v1(81.274,108.54) R3.2
  Bottom Layer w0.254: U2.9 U2.8 v1(81.274,108.54)
NetR4_2: R4.2 U2.13 U2.14 | length 5.5
  Top Layer w0.254: R4.2 73.337,108.54 v1(73.654,108.857)
  Bottom Layer w0.254: v1(73.654,108.857) U2.14 U2.13
NetR5_1: R5.1 R19.2 U4.10 | length 32.4
  Top Layer w0.254: R5.1 30.162,111.84 29.82,111.497 29.82,104.724 v1(30.328,104.216) 30.328,90.703 v1(33.147,87.884)
  Bottom Layer w0.254: v1(30.328,104.216) 30.328,101.54 R19.2 ; U4.10 v1(33.147,87.884)
NetR5_2: R5.2 U3.1 U3.2 | length 3.9
  Top Layer w0.254: R5.2 31.598,114.54 v1(32.704,115.646)
  Bottom Layer w0.254: v1(32.704,115.646) 32.711,115.654 U3.1 U3.2
NetR6_2: R6.2 U3.6 U3.7 | length 4.6
  Top Layer w0.254: v1(42.723,115.595) 42.723,114.54 R6.2
  Bottom Layer w0.254: U3.6 U3.7 41.274,115.595 v1(42.723,115.595)
NetR7_1: R7.1 R20.1 U4.12 | length 27.4
  Top Layer w0.254: R7.1 45.034,105.84 45.06,105.815 v1(45.06,103.099)
  Bottom Layer w0.254: U4.12 35.687,89.078 35.611,89.154 35.611,95.555 41.596,101.54 R20.1 45.034,101.54 45.06,101.565 v1(45.06,103.099)
NetR7_2: R7.2 U3.8 U3.9 | length 7
  Top Layer w0.254: v1(40.321,108.54) R7.2
  Bottom Layer w0.254: U3.9 U3.8 41.274,109.492 v1(40.321,108.54)
NetR8_2: R8.2 U3.13 U3.14 | length 5.6
  Top Layer w0.254: R8.2 v1(33.654,108.54)
  Bottom Layer w0.254: v1(33.654,108.54) U3.14 U3.13
NetR13_1: R13.1 U5.42 | length 38.4
  Top Layer w0.254: v1(53.975,69.19) 54.305,69.52 54.305,72.009 50.287,76.027 50.287,77.128 52.534,79.375 54.804,79.375 56.074,80.645 56.074,82.947 57.277,84.149 v1(57.277,88.12)
  Bottom Layer w0.254: U5.42 51.058,62.15 51.774,62.866 51.774,66.989 v1(53.975,69.19) ; v1(57.277,88.12) 57.279,88.12 57.865,88.706 R13.1
NetR14_1: R14.1 U5.43 | length 83.6
  Top Layer w0.254: v1(55.22,67.843) 56.528,69.152 56.528,82.759 56.743,82.973 58.54,82.973 59.817,84.25 v1(59.817,89.84)
  Bottom Layer w0.254: R14.1 57.328,102.061 59.026,103.759 72.707,103.759 73.101,103.365 73.101,93.472 69.469,89.84 v1(59.817,89.84) ; U5.43 51.558,61.832 53.322,63.596 53.322,66.565 54.6,67.843 v1(55.22,67.843)
NetR15_1: R15.1 U5.45 | length 54.1
  Top Layer w0.254: R15.1 51.846,99.361 53.608,97.599 53.608,86.798 52.577,85.767 52.577,84.059 54.384,82.251 54.384,80.356 54.038,80.01 52.251,80.01 49.809,77.568 49.809,71.806 v1(50.19,71.425) ; v1(50.491,64.364) 48.578,64.364 48.133,63.919 48.133,60.642 50.559,58.217 v1(50.698,58.217)
  Bottom Layer w0.254: v1(50.19,71.425) 50.491,71.124 v1(50.491,64.364) ; v1(50.698,58.217) 52.07,58.217 52.558,58.705 U5.45
NetR16_1: R16.1 U5.46 | length 75.6
  Top Layer w0.254: v1(55.165,88.053) R16.1
  Bottom Layer w0.254: U5.46 53.058,60.96 57.449,65.351 65.471,65.351 76.142,76.022 83.185,76.022 83.642,76.479 83.642,78.359 83.414,78.588 82.359,78.588 72.936,88.011 58.125,88.011 57.557,87.443 55.775,87.443 v1(55.165,88.053)
SWDCLK: P2.2 U5.37 | length 46.8
  Top Layer w0.254: v1(47.625,59.334) 49.42,57.54 50.979,57.54 51.511,58.072 51.511,60.008 53.001,61.498 54.238,61.498 61.701,68.961 v1(61.722,68.961)
  Bottom Layer w0.254: v1(47.625,59.334) 48.26,59.969 48.558,59.969 U5.37 ; v1(61.722,68.961) 61.807,68.876 62.052,68.876 62.094,68.834 68.312,68.834 76.948,77.47 P2.2
SWDIO: P2.3 U5.34 | length 54.4
  Top Layer w0.254: v1(49.403,56.769) 49.233,56.769 46.355,59.647 46.355,63.754 47.667,65.066 56.325,65.066 59.436,68.177 59.436,69.342 v1(60.071,69.977) ; v1(81.026,78.486) P2.3
  Bottom Layer w0.254: U5.34 48.595,57.122 48.948,56.769 v1(49.403,56.769) ; v1(60.071,69.977) 68.813,69.977 77.322,78.486 v1(81.026,78.486)
V3.3: C2.2 C3.2 C4.2 C5.2 C6.2 P2.4 P3.2 P4.6 P6.6 P7.2 P8.2 P9.2 P10.2 U1.2 U2.4 U3.4 U4.4 U5.9 U5.24 U5.36 U5.48 | length 326.3
  Top Layer w0.254: v1@39.814,51.245 v1(40.068,51.245) ; P4.6 62.398,83.566 64.453,83.566 64.77,83.883 64.77,84.194 ccw(c63.814,84.69) 64.77,85.186 64.77,110.476 v1(68.834,114.54)
  Top Layer w0.7: C2.2@31.289,58.42 31.242,58.373 31.242,49.178 31.652,48.768 37.592,48.768 v1(40.068,51.245) ; U1.2 38.481,52.578 v1@39.814,51.245 ; v1(36.925,114.167) 40.733,117.974 P7.2 40.733,134.234 40.916,134.417 52.584,134.417 52.733,134.268 P8.2 52.733,131.951 53.645,131.039 56.925,131.039 P6.6 64.505,129.921 64.733,129.921 ; v1(47.625,51.244) 48.881,52.501 52.628,52.501 ; C6.2 52.628,50.831 52.628,52.501 ; v1(53.975,54.673) 53.975,53.848 52.628,52.501 ; v1(54.058,57.15) v1(62.103,57.15) ; P9.2 64.733,129.921 ; v1(71.501,116.18) v1(76.733,121.412) 76.733,125.832 ; P10.2 76.733,129.921 ; P3.2 85.344,74.549 85.344,79.756 P2.4 87.249,87.249 87.249,115.316 76.733,125.832 ; 64.733,129.921 76.733,129.921 ; 76.733,125.832 76.733,129.921
  Bottom Layer w0.254: U4.4 34.417,82.867 34.608,83.058 39.26,83.058 40.102,82.216 C5.2 51.939,82.216 52.705,82.982 59.566,82.982 P4.6 ; v1(36.925,114.167) 37.464,114.705 U3.4 ; U5.36 49.836,58.122 50.427,57.531 53.34,57.531 ; v1(47.625,51.244) 48.558,51.244 U5.24 ; v1(53.975,54.673) 54.038,54.673 54.584,54.128 55.482,54.128 U5.9 ; v1@53.975,57.067 53.975,57.112 53.556,57.531 53.34,57.531 ; U5.48 54.058,58.249 53.34,57.531 ; v1(68.834,114.54) C3.2 C3.2@71.501,114.54 ; v1(76.733,121.412) 77.464,120.681 U2.4
  Bottom Layer w0.7: C4.2 31.764,114.54 31.964,114.34 31.964,114.329 32.374,113.919 36.678,113.919 v1(36.925,114.167) ; v1(40.068,51.245) v1(47.625,51.244) ; v1(53.975,54.673) v1@53.975,57.067 ; v1(62.103,57.15) 62.103,63.224 63.014,64.135 74.93,64.135 P3.2 ; C3.2@71.501,114.54 v1(71.501,116.18)
Vpp: C1.2 P1.2 U1.3 | length 46.7
  Top Layer w0.254: U1.3 39.874,54.868 46.355,48.387 P1.2
  Bottom Layer w0.7: C1.2 76.374,49.737 76.454,49.657 P1.2
zeroReg1: C13.2 L1.2 R17.1 | length 29.5
  Bottom Layer w0.254: C13.2 53.42,92.075 58.776,92.075 60.325,90.526 62.27,90.526 62.295,90.551 62.295,91.363 61.595,92.063 61.595,98.691 61.744,98.84 R17.1
zeroReg2: C14.2 L2.2 R18.1 | length 50.2
  Bottom Layer w0.254: C14.2 48.307,96.473 47.498,97.282 47.498,105.459 48.53,106.491 L2.2 70.725,106.491 78.376,98.84 R18.1
zeroReg3: C15.2 L3.2 R19.1 | length 36.7
  Top Layer w0.254: v1(49.276,108.483) L3.2 48.53,106.491 48.307,106.268 48.307,96.837 48.671,96.473 C15.2
  Bottom Layer w0.254: R19.1 33.156,98.84 43.84,109.525 48.235,109.525 v1(49.276,108.483)
zeroReg4: C16.2 L4.2 R20.2 | length 28.2
  Top Layer w0.254: C16.2 v1(52.277,94.615) ; v1(59.817,94.742) 60.579,94.742 62.295,93.026 L4.2
  Bottom Layer w0.254: R20.2 46.038,98.84 46.825,98.053 46.825,95.567 47.269,95.123 51.769,95.123 v1(52.277,94.615) 52.404,94.742 v1(59.817,94.742)
pads on no net: U1.4 U5.1 U5.2 U5.3 U5.4 U5.14 U5.15 U5.16 U5.17 U5.21 U5.22 U5.25 U5.26 U5.27 U5.28 U5.29
copper on no net: | length 609.6
  Top Layer w0.254: 25.464,46.79 89.464,46.79 89.464,127.19 80.464,127.19 80.464,135.19 34.464,135.19 34.464,127.19 25.464,127.19 25.464,46.79
  Bottom Layer w0.254: 25.464,46.79 89.464,46.79 89.464,127.19 80.464,127.19 80.464,135.19 34.464,135.19 34.464,127.19 25.464,127.19 25.464,46.79

## Silkscreen, mask and mechanical layers (free items; w line width, h text height)
Bottom Overlay:
  text "by Harakivi" at 27.051,99.695 h1.52 r270